# Altium PCB trace_6.PcbDoc
Units mil, origin at the board's own origin, x right, y up, seen from the top; angles counter-clockwise.
Board outline 3155 x 1925 mil, 2 copper layers (Top Layer, Bottom Layer); 2 components, 1 nets, 14 pads, 0 vias.
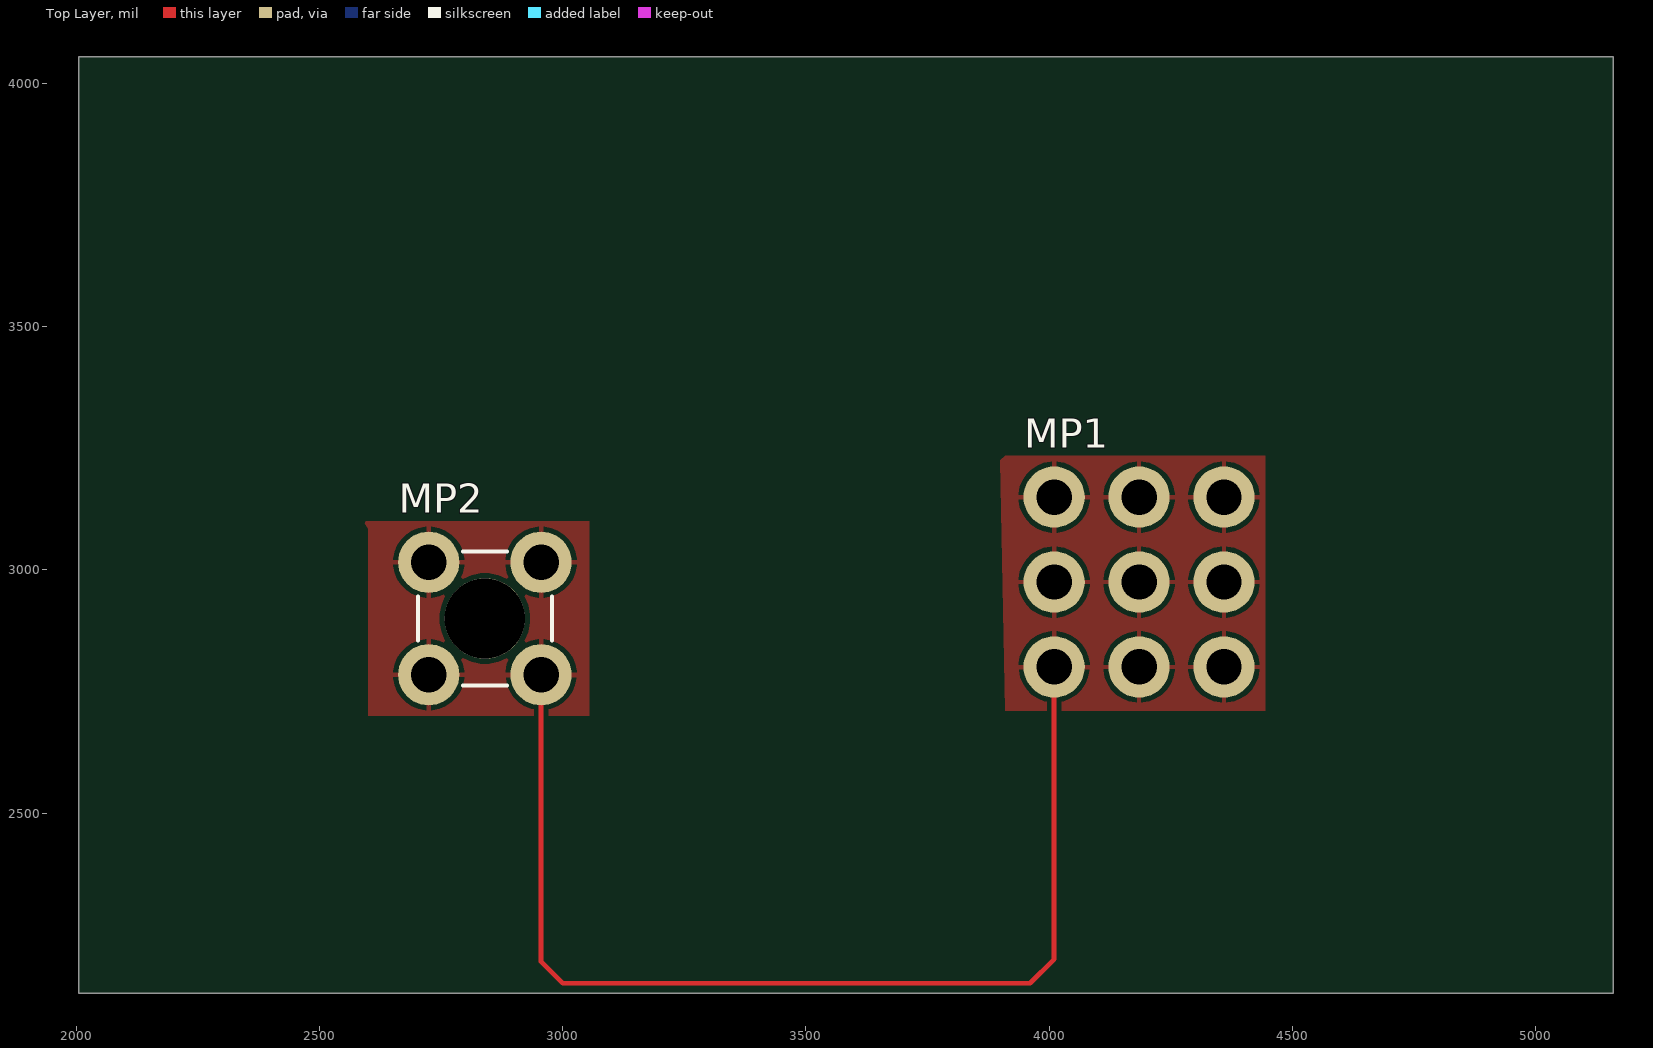
[diagram p0: Top Layer view]
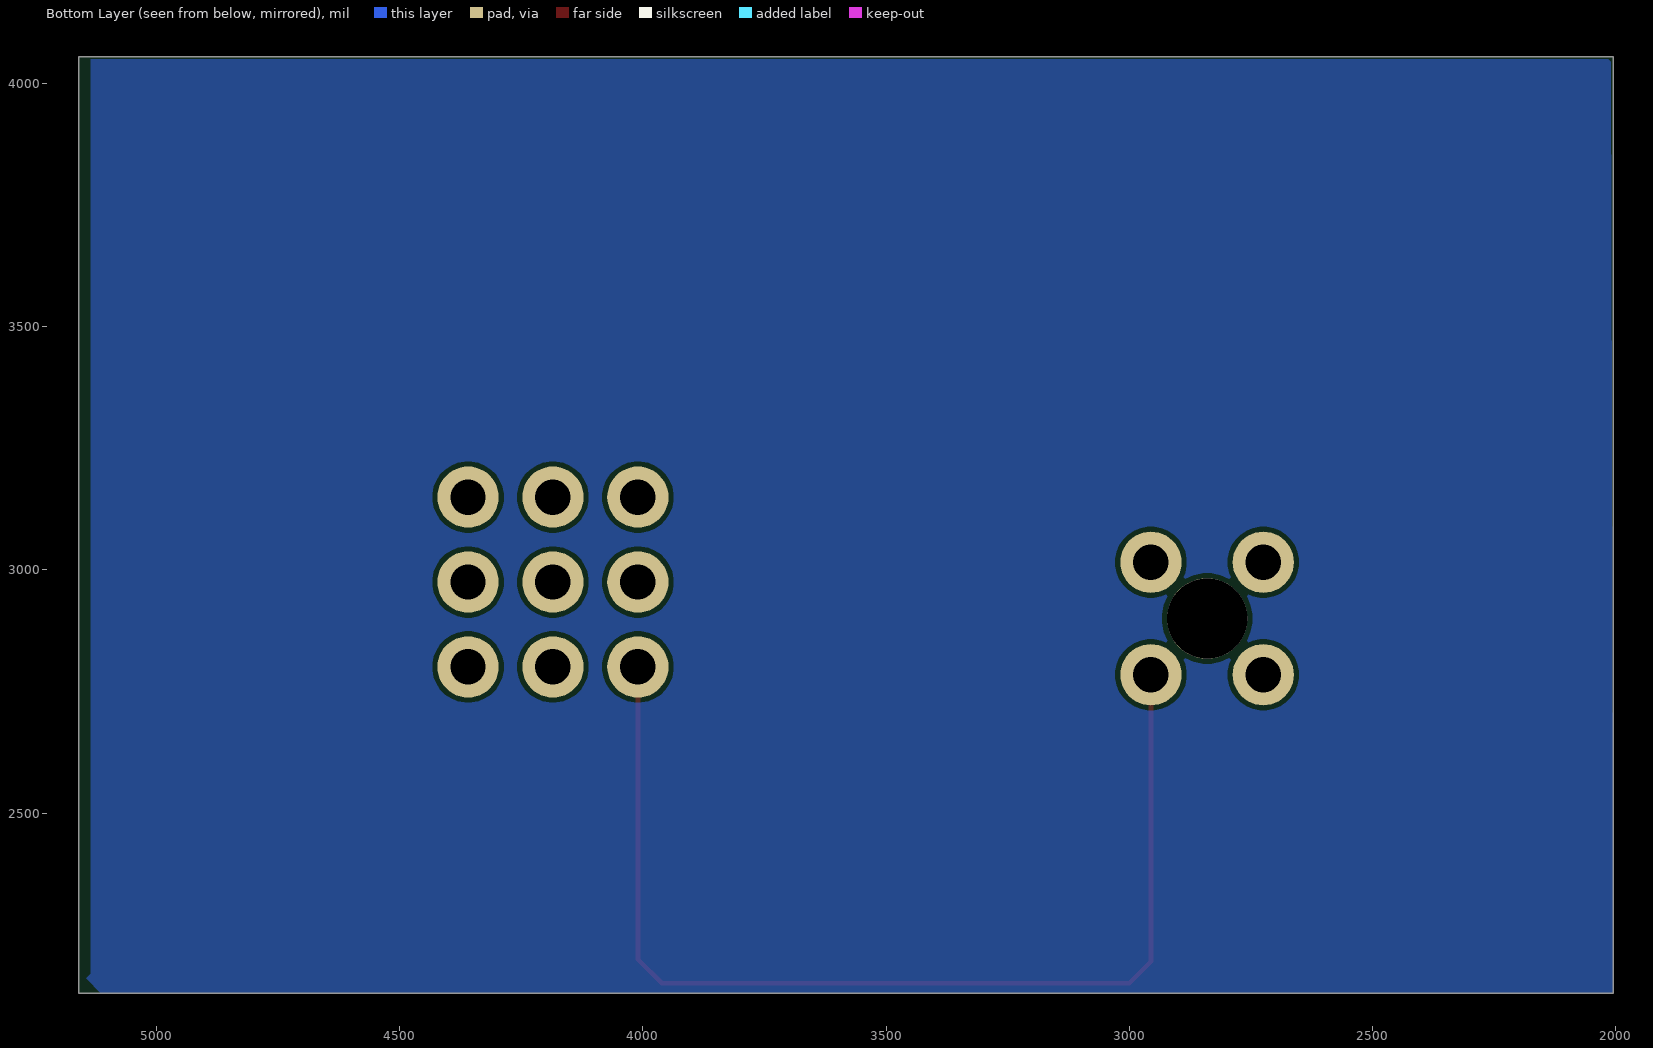
[diagram p1: Bottom Layer view, seen from below]

## Layer stack, top to bottom
Top Solder: solder mask 0.4, Solder Resist, Dk 3.5
Top Layer: signal copper 1.4
Dielectric 1: dielectric 12.6, FR-4, Dk 4.8
Bottom Layer: signal copper 1.4
Bottom Solder: solder mask 0.4, Solder Resist, Dk 3.5

## Board outline
2005,2130 5160,2130 5160,4055 2005,4055

## Design rules (kind name [scope] priority, off if disabled: settings)
Clearance [All] p1: gap=10 ignorepadtopadclearanceinfootprint=FALSE except(0: Arc-Hole Track-Hole SMDPad-Hole THPad-Hole Via-Hole Fill-Hole Poly-Hole Region-Hole Text-Hole)
PolygonConnect [All] p1: connectstyle=Relief reliefconductorwidth=10 reliefentries=4 polygonreliefangle="90 Angle" airgapwidth=10
RoutingVias [All] p1: holewidth=28 width=50 viastyle="Through Hole" minholewidth=28 minwidth=50 maxholewidth=28 maxwidth=50
SolderMaskExpansion [All] p1: expansion=4 istentingtop=FALSE
Width [All] p1: maxlimit=10 minlimit=10 preferedwidth=10
30 further rules are at their usual default settings.

## Components (designator, comment, footprint, x,y, rotation, side; value= is the part's Value field where it differs from the comment)
MP1 "74651194R" "WURTH 74651194" 4185,2975 r0 top
MP2 "74650074R" "WURTH 74650074" 2840,2900 r0 top

## Footprints (in the part's own frame and the unit in brackets; to place one, negate y for a bottom-side part, rotate by r counter-clockwise, add the part's x,y. Pads: shape width x height; smd on the part's side, far side on the other; paste and mask are expansions set on the pad)
"WURTH 74650074" [mm] "REDCUBE THR with internal thread, M4x2.5mm, through"
  round 3.2 hole 1.85: 1(-2.935,-2.935) 1(-2.935,2.935) 1(2.935,-2.935) 1(2.935,2.935)
  round 4.2 hole 4.2 unplated: MH1(0,0)
  silkscreen extent -3.5,-3.5 3.5,3.5, body extent -3.5,-3.5 3.5,3.5, height 3
"WURTH 74651194" [mm] "Shank, THR, 9 pins, 10x10mm, M4, thread 5mm"
  round 3.2 hole 1.85: 1(-4.435,-4.435) 1(-4.435,0) 1(-4.435,4.435) 1(0,-4.435) 1(0,0) 1(0,4.435) 1(4.435,-4.435) 1(4.435,0) 1(4.435,4.435)
  body extent -5,-5.01 5,4.99, height 9

## Part data
MP1: "TERM REDCUBE 9PIN PCB", Current Rating (Amps)="85 A", Manufacturer="Würth Elektronik", Supplier Part Number 1=732-10907-1-ND, ComponentLink1Description=Datasheet, ComponentLink1URL=https://katalog.we-online.de/em/datasheet/74651194R.pdf, ComponentLink2Description="DigiKey Link", ComponentLink2URL=https://www.digikey.com/en/products/detail/würth-elektronik/74651194R/6644003, lastupdated="07/08/2022 21:20:29", Lifecycle Status=Active, Minimum Order=1, Mounting Type="Through Hole", Number of Pins=9, Packaging=TapeAndReel, Part Number=74651194R, Part Status=Active, price=2.24, Series="REDCUBE WP-THRSH", Supplier 1=DigiKey, Terminal Type="Shank Terminal", Termination=Solder
MP2: "TERM REDCUBE M4 4PIN PCB", Current Rating (Amps)="50 A", Manufacturer="Würth Elektronik", Supplier Part Number 1=732-10883-1-ND, ComponentLink1Description=Datasheet, ComponentLink1URL=https://katalog.we-online.de/em/datasheet/74650074R.pdf, ComponentLink2Description="DigiKey Link", ComponentLink2URL=https://www.digikey.com/en/products/detail/würth-elektronik/74650074R/6643979, Features="Screw not Included", lastupdated="07/08/2022 20:40:07", Lifecycle Status=Active, Minimum Order=1, Mounting Type="Through Hole", Number of Pins=4, Packaging=TapeAndReel, Part Number=74650074R, Part Status=Active, price=2.38, Screw Size=M4, Series="REDCUBE WP-THRBU", Supplier 1=DigiKey, Terminal Type="Screw Terminal, Power Tap", Termination=Solder

## Nets (pads, with @x,y where several pads share a name; then routed paths per layer and width w, separated by ;. In a path a pad name is that pad's centre, name@x,y a point inside that pad or via, vN(x,y) a via of type N, cw(c..) or ccw(c..) an arc to the next point about the centre after c; other vN are vias at no path point)
NetMP1_1: MP1.1 MP2.1 | length 2284.6
  Top Layer w10: MP2.1@2955.55,2784.45 2955.55,2194.45 3000,2150 3960.86,2150 4010.39,2199.53 MP1.1@4010.39,2800.39
pads on no net: MP2.MH1

## Polygon pours and split planes (outlines as drawn)
no net on Bottom Layer "NONET_L02_P001" (solid, pour order 1): 2010,4045 2015,4050 5135,4050 5135,2170 5145,2160 5115,2130 2005,2130
NetMP1_1 on Top Layer "NETMP1_1_L01_P003" (solid, pour order 3): 2590,3100 3055,3100 3055,3050 3055,2700 2640,2700 2600,2700 2600,3085
NetMP1_1 on Top Layer "NETMP1_1_L01_P002" (solid, pour order 2): 3900,3225 3910,3235 4445,3235 4445,2710 3910,2710